# Altium PCB PCB1.PcbDoc
Units mm, origin at the board's own origin, x right, y up, seen from the top; angles counter-clockwise.
Board outline 20 x 15 mm, 2 copper layers (Top Layer, Bottom Layer); 13 components, 8 nets, 38 pads, 45 vias.
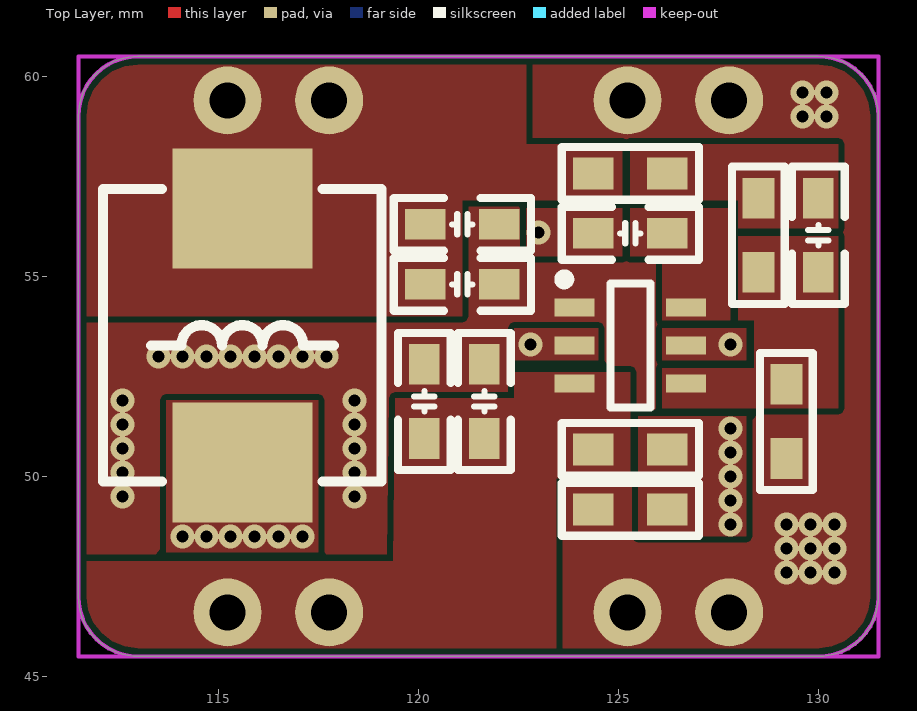
[diagram p0: Top Layer view]
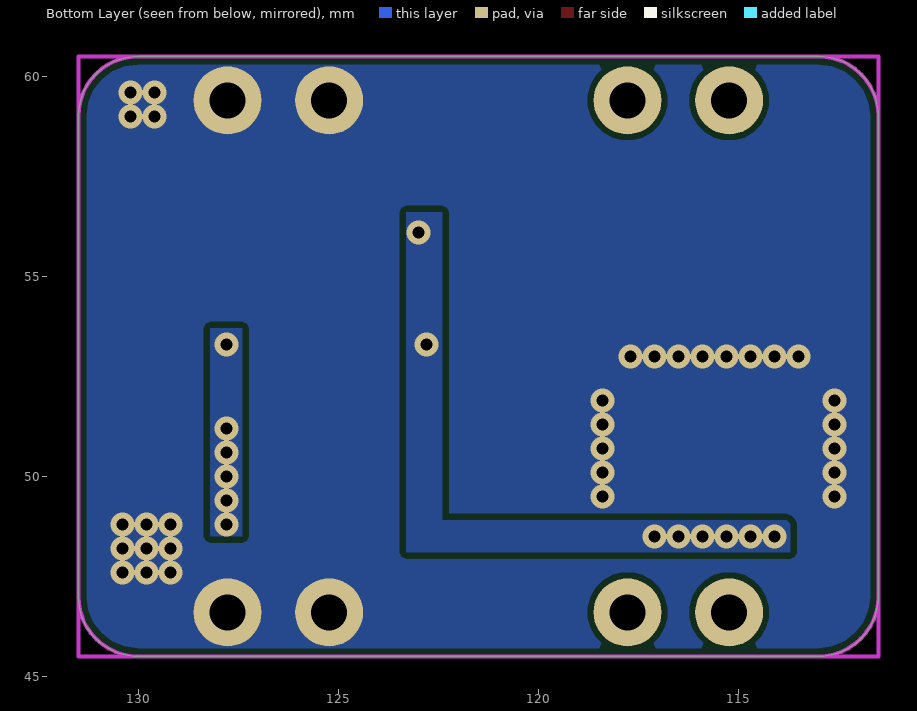
[diagram p1: Bottom Layer view, seen from below]
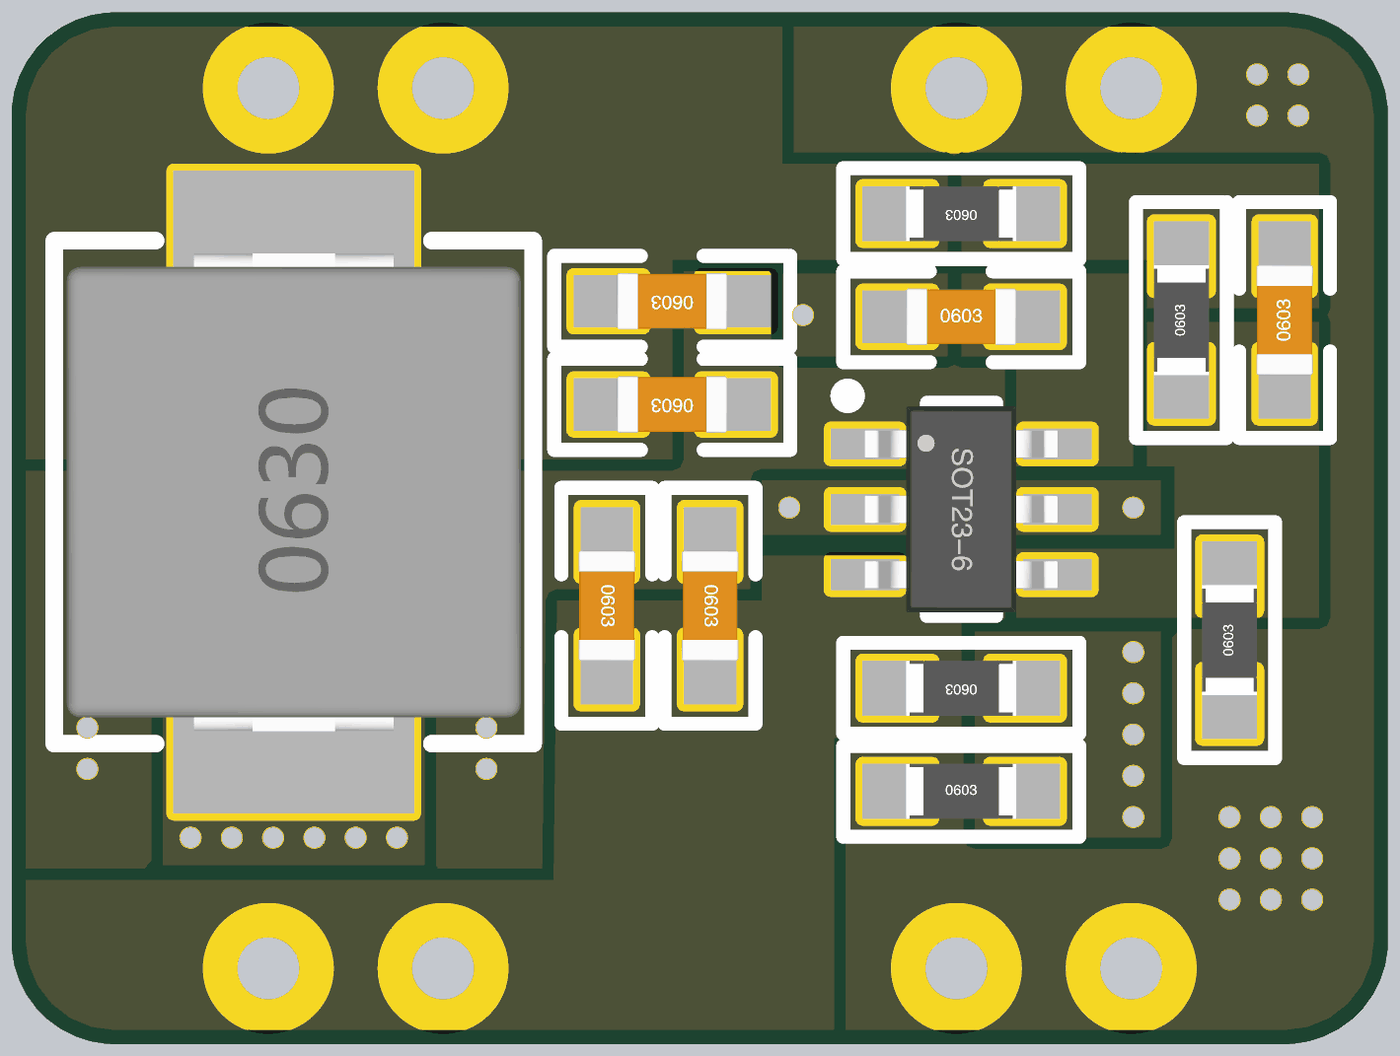
[diagram p2: 3D render of the assembled board from above, using the file's embedded part models]

## Layer stack, top to bottom
Top Solder: solder mask 0.0102, Solder Resist, Dk 3.5
Top Layer: signal copper 0.0356
Dielectric 1: dielectric 0.32, FR-4, Dk 4.8
Bottom Layer: signal copper 0.0356
Bottom Solder: solder mask 0.0102, Solder Resist, Dk 3.5

## Board outline
111.5,47 111.5,59 cw(c113,59) 113,60.5 130,60.5 cw(c130,59) 131.5,59 131.5,47 cw(c130,47) 130,45.5 113,45.5 cw(c113,47)

## Design rules (kind name [scope] priority, off if disabled: settings)
Clearance [All] p1: gap=0.152 ignorepadtopadclearanceinfootprint=FALSE except(0: Arc-Hole Track-Hole SMDPad-Hole THPad-Hole Via-Hole Fill-Hole Poly-Hole Region-Hole Text-Hole)
PlaneConnect [All] p1: planeconnectstyle=Direct reliefexpansion=0.508 reliefentries=4 reliefconductorwidth=0.254 reliefairgap=0.254
PolygonConnect [All] p1: connectstyle=Direct reliefconductorwidth=0.254 reliefentries=4 polygonreliefangle="90 Angle" airgapwidth=0.254
RoutingVias [All] p1: holewidth=0.3 width=0.6 viastyle="Through Hole" minholewidth=0.3 minwidth=0.6 maxholewidth=0.3 maxwidth=0.6
SolderMaskExpansion [All] p1: expansion=0.102 istentingtop=FALSE
Width [All] p1: maxlimit=5 minlimit=0.254 preferedwidth=1
29 further rules are at their usual default settings.

## Classes and differential pairs
component class Sheet1: R2

## Components (designator, comment, footprint, x,y, rotation, side; value= is the part's Value field where it differs from the comment)
C1 "" C_0603 121.65,51.873 r270 top
C2 "" C_0603 120.15,51.873 r270 top
C3 "" C_0603 125.3,56.075 r0 top
C4 "" C_0603 121.1,54.8 r180 top
C5 "" C_0603 121.1,56.3 r180 top
C6 "" C_0603 130,56.027 r90 top
L1 "" L-SMD-0630 115.6,53.525 r90 top
R1 "" R_0603 125.3,50.675 r180 top
R2 "" R_0603 125.3,49.175 r0 top
R3 "" R_0603 125.3,57.575 r180 top
R4 "" R_0603 128.5,56.027 r90 top
R5 "" R_0603 129.2,51.373 r90 top
U1 "" SOT23-6L 125.3,53.275 r270 top

## Footprints (in the part's own frame and the unit in brackets; to place one, negate y for a bottom-side part, rotate by r counter-clockwise, add the part's x,y. Pads: shape width x height; smd on the part's side, far side on the other; paste and mask are expansions set on the pad)
C_0603 [mil]
  rect 40x30 smd: 1(-36.5,0) 2(36.5,0)
  silkscreen extent -68,-26 68,26, body extent -31,-16 31,16, height 32
L-SMD-0630 [mm] "一体化成型电感"
  rect 3x3.5 smd: 1(-3.175,0) 2(3.175,0)
  silkscreen extent -3.66,-3.48 3.66,3.48, body extent -3.47,-3.3 3.47,3.3, height 3.05
R_0603 [mil]
  rect 40x31.5 smd: 1(-36.5,0) 2(36.5,0)
  silkscreen extent -68,-26 68,26, body extent -31,-16 32,16, height 16
SOT23-6L [mm]
  rect 0.45x1 smd: 1(-0.95,-1.397) 2(0,-1.397) 3(0.95,-1.397) 4(0.95,1.397) 5(0,1.397) 6(-0.95,1.397)
  silkscreen extent -1.77,-1.78 1.55,0.51, body extent -1.5,-1.4 1.5,1.4, height 1.15

## Part data
C1 C2 C3 C4 C5 C6: library part C_0603, "4.7nf-4.7uf"
L1: library part L_33uH_0603, "一体成型电感"
R1 R2 R3 R4 R5: library part R_0603
U1: library part TPS54202DDCR, BOM_JLCPCB Part Class="Extended Part", BOM_Manufacturer="Texas Instruments", BOM_Manufacturer Part=TPS54202DDCR, BOM_Supplier=LCSC, BOM_Supplier Part=C191884, Contributor=LCSC, spicePre=U, spiceSymbolName=TPS54202DDCR

## Free pads (board coordinates)
  round 1.7 hole 0.9: 9(115.23,46.6) 9(115.23,59.4) 9(125.23,46.6) 10(117.77,46.6) 10(117.77,59.4) 10(127.77,46.6) 10(127.77,59.4) ""(125.23,59.4)

## Via types
v1: diameter 0.6, hole 0.3, Top Layer to Bottom Layer, tented both sides, 45 vias

## Nets (pads, with @x,y where several pads share a name; then routed paths per layer and width w, separated by ;. In a path a pad name is that pad's centre, name@x,y a point inside that pad or via, vN(x,y) a via of type N, cw(c..) or ccw(c..) an arc to the next point about the centre after c; other vN are vias at no path point)
5V: C4.2 C5.2 L1.2 pad.9@115.23,59.4 pad.10@117.77,59.4 R3.2
GND: C1.1 C2.1 C4.1 C5.1 pad. pad.9@125.23,46.6 pad.10@127.77,46.6 pad.10@127.77,59.4 R2.1 R5.1 U1.1
  other v1: 129.2,47.6 129.8,47.6 130.4,47.6 129.2,48.2 129.8,48.2 130.4,48.2 129.2,48.8 129.8,48.8 130.4,48.8 112.6,49.5 118.4,49.5 112.6,50.1 118.4,50.1 112.6,50.7 118.4,50.7 112.6,51.3 118.4,51.3 112.6,51.9 118.4,51.9 113.5,53 114.1,53 114.7,53 115.3,53 115.9,53 116.5,53 117.1,53 117.7,53 129.6,59 130.2,59 129.6,59.6 130.2,59.6
NetC3_1: C3.1 L1.1 U1.2
  other v1: 114.1,48.5 114.7,48.5 115.3,48.5 115.9,48.5 116.5,48.5 117.1,48.5 122.8,53.3 123,56.1
NetC3_2: C3.2 U1.6
NetC6_1: C6.1 R4.1 R5.2 U1.4
NetC6_2: C6.2 R3.1 R4.2
NetR1_1: R1.1 R2.2 U1.5
  other v1: 127.8,48.8 127.8,49.4 127.8,50 127.8,50.6 127.8,51.2 127.8,53.3
VCC: C1.2 C2.2 pad.9@115.23,46.6 pad.10@117.77,46.6 R1.2 U1.3

## Polygon pours and split planes (outlines as drawn)
VCC on Top Layer "NONET_L-01_P-001" (solid, pour order 30): 125.3,52.6 125.3,49.95 123.45,49.95 123.45,45.5 111.55,45.5 111.55,47.883 119.375,47.883 119.425,51.95 122.4,51.95 122.4,52.6
GND on Top Layer "NONET_L-01_P-001" (solid, remove dead copper, pour order 35): 111.5,60.5 131.5,60.5 131.5,45.5 111.55,45.5
5V on Top Layer "NONET_L-01_P-001" (solid, pour order 32): 121.1,54 121.1,56.9 125.1,56.9 125.1,58.3 122.7,58.3 122.7,60.5 111.5,60.5 111.5,54
NetC3_1 on Top Layer "NONET_L-01_P-001" (solid, pour order 26): 125.1,56.7 122.7,56.7 122.7,55.5 125.1,55.5
NetC6_1 on Top Layer "NONET_L-01_P-001" (solid, pour order 25): 126.1,52.7 128.4,52.7 128.4,53.9 128,53.9 128,56 130.5,56 130.5,51.7 126.1,51.7
NetC6_2 on Top Layer "NONET_L-01_P-001" (solid, pour order 23): 125.3,56.9 128,56.9 128,56.2 130.5,56.2 130.5,58.3 125.3,58.3
NetR1_1 on Top Layer "NONET_L-01_P-001" (solid, pour order 20): 126.1,52.9 128.2,52.9 128.2,53.7 126.1,53.7
NetC3_1 on Top Layer "NONET_L-01_P-001" (solid, pour order 19): 113.7,51.9 117.5,51.9 117.5,48.1 113.7,48.1
NetC3_1 on Top Layer "NONET_L-01_P-001" (solid, pour order 15): 124.5,53.7 124.5,52.9 122.4,52.9 122.4,53.7
NetC3_2 on Top Layer "NONET_L-01_P-001" (solid, pour order 8): 125.3,56.7 127.8,56.7 127.8,53.9 126.1,53.9 126.1,55.5 125.3,55.5
NetR1_1 on Top Layer "NONET_L-01_P-001" (solid, pour order 4): 125.5,51.5 125.5,48.5 128.2,48.5 128.2,51.5
GND on Bottom Layer "NONET_L-01_P-001" (solid, remove dead copper, pour order 33): 111.5,60.5 131.5,60.5 131.5,45.5 111.5,45.5
NetC3_1 on Bottom Layer "NONET_L-01_P-001" (solid, pour order 18): 123.3,56.6 123.3,48.1 113.7,48.1 113.7,48.9 122.4,48.9 122.4,56.6
NetR1_1 on Bottom Layer "NONET_L-01_P-001" (solid, pour order 7): 127.4,53.7 128.2,53.7 128.2,48.5 127.4,48.5

## Keep-outs
Keep-Out Layer:
  lines w0.1: 111.5,47 ccw(c113,47) 113,45.5 ; 111.5,59 cw(c113,59) 113,60.5 ; 130,45.5 ccw(c130,47) 131.5,47 ; 130,60.5 cw(c130,59) 131.5,59 ; 111.5,45.5 111.5,60.5 131.5,60.5 131.5,45.5 111.5,45.5

## Silkscreen, mask and mechanical layers (free items; w line width, h text height)
Top Overlay: